# Altium PCB PCB1.PcbDoc (part 1 of 2)
Units mm, origin at the board's own origin, x right, y up, seen from the top; angles counter-clockwise.
Board outline 91 x 53 mm, 2 copper layers (Top Layer, Bottom Layer); 68 components, 95 nets, 342 pads, 353 vias.
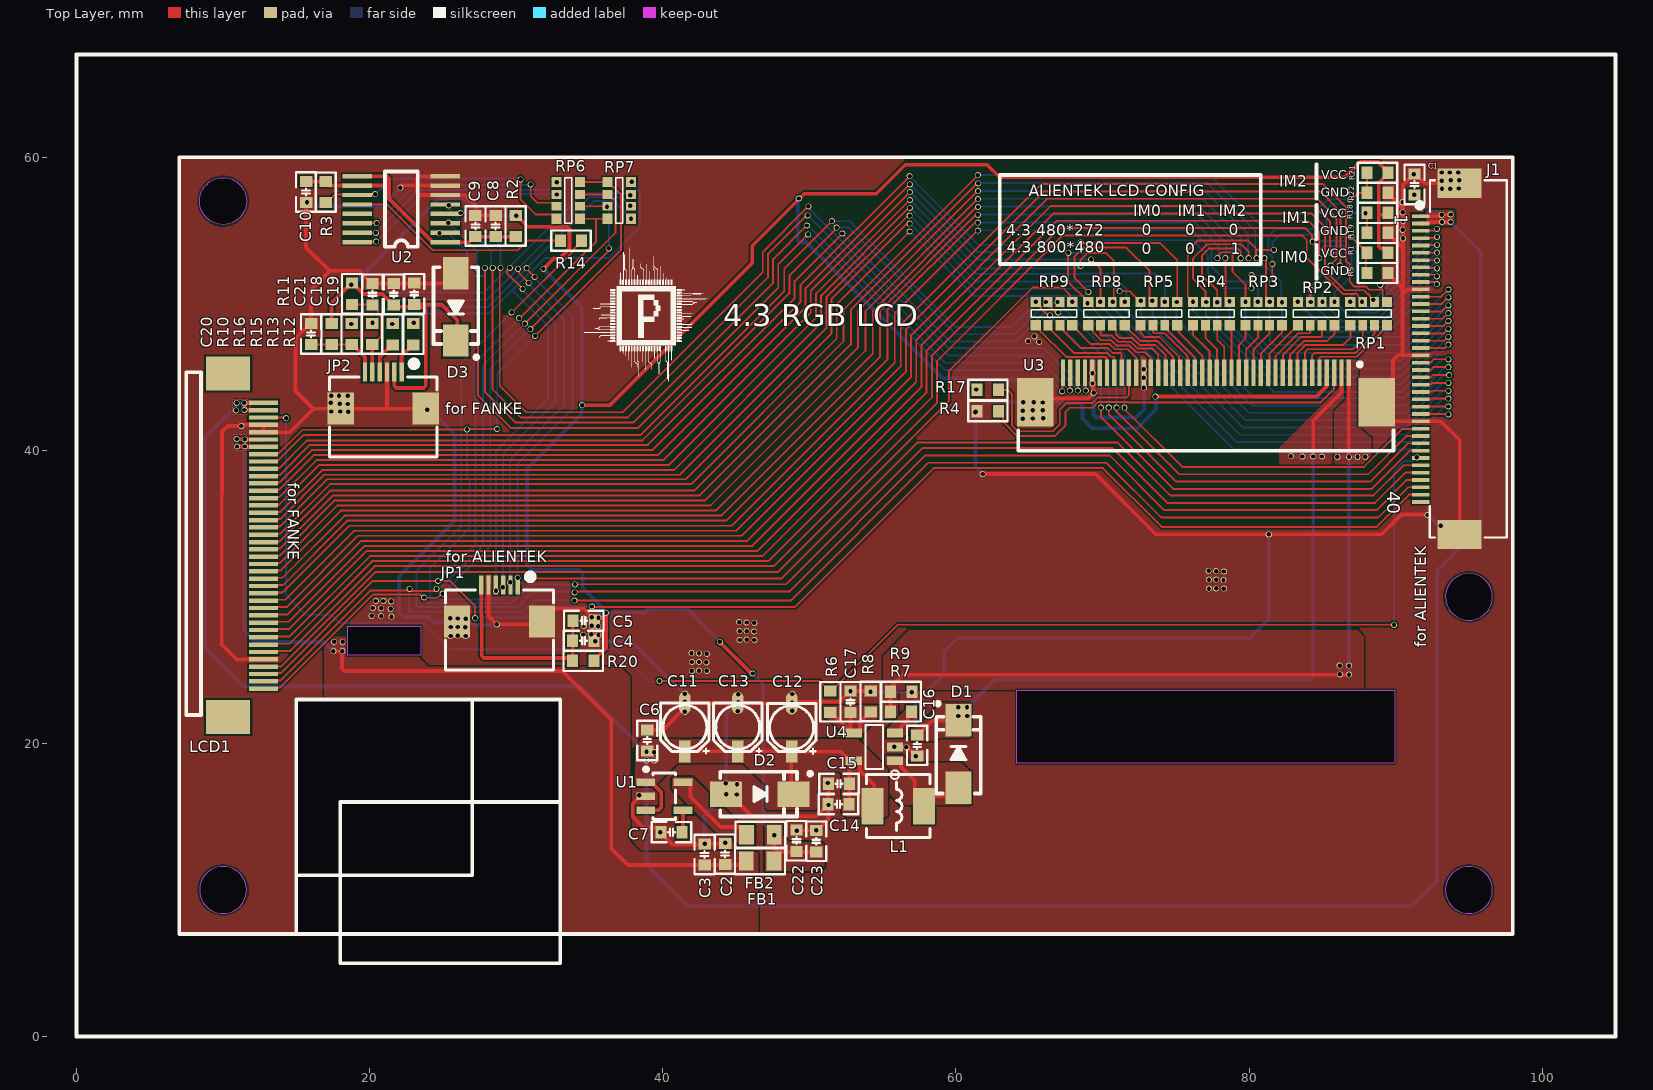
[diagram p0: Top Layer view]
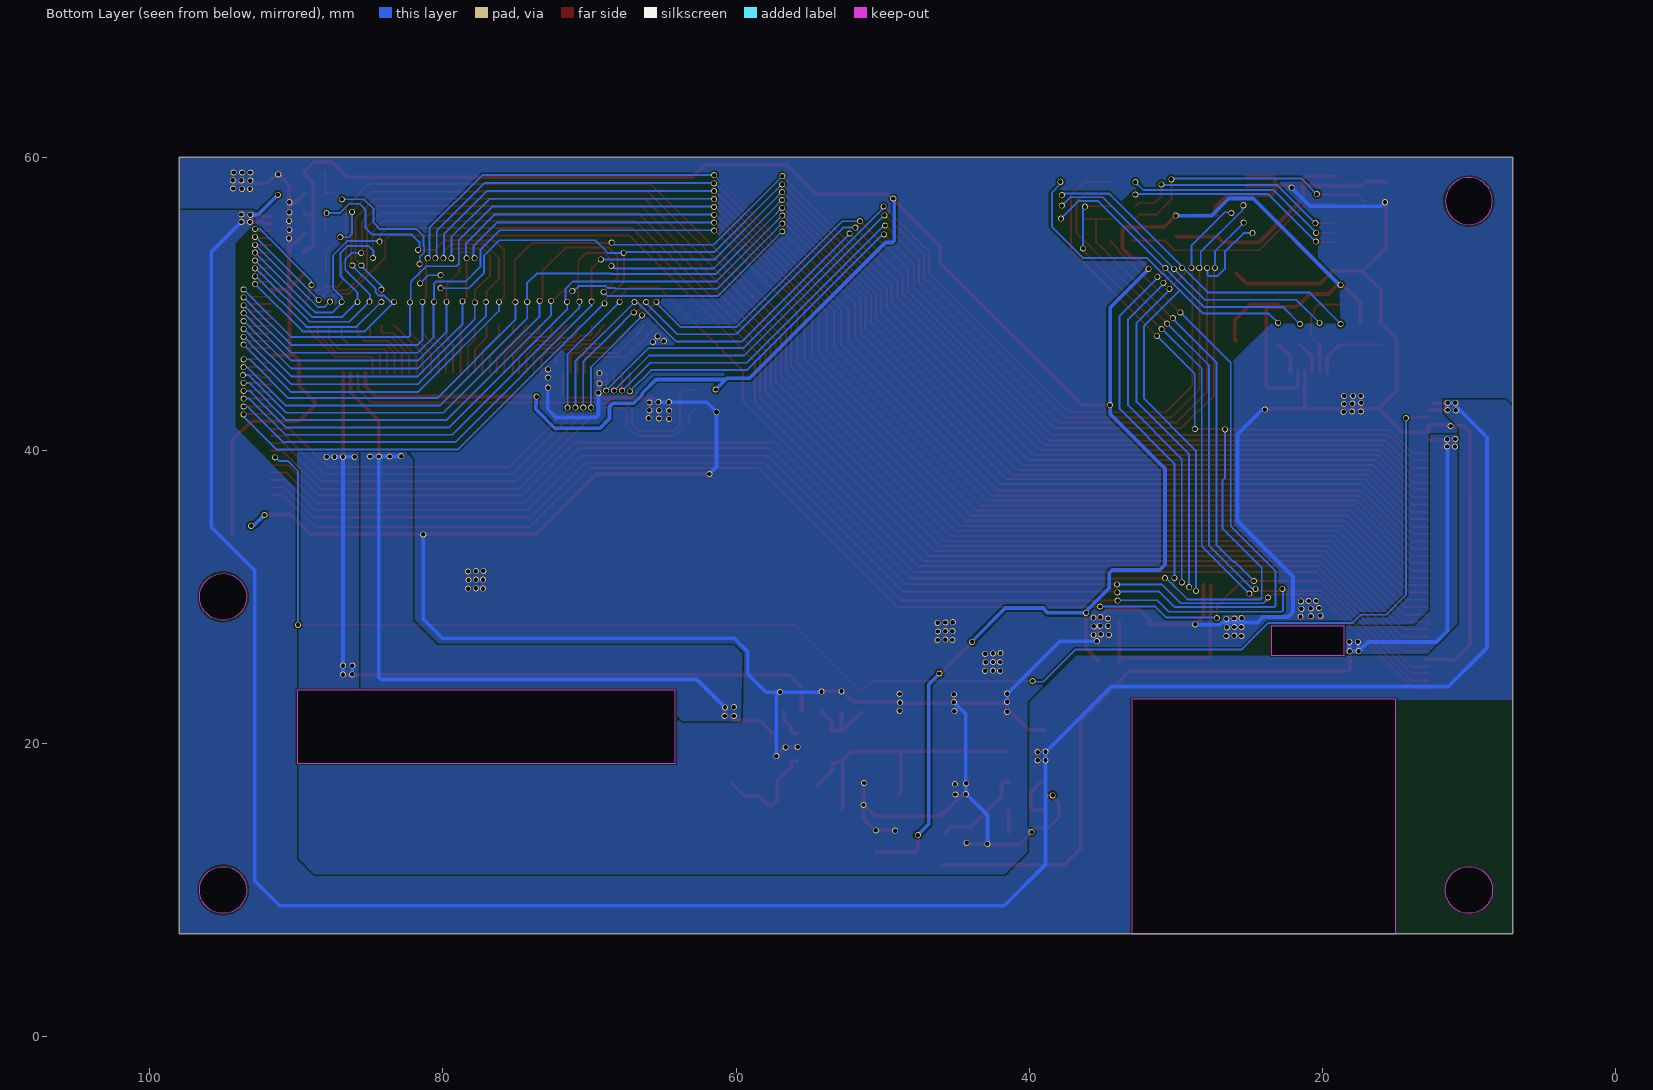
[diagram p1: Bottom Layer view, seen from below]
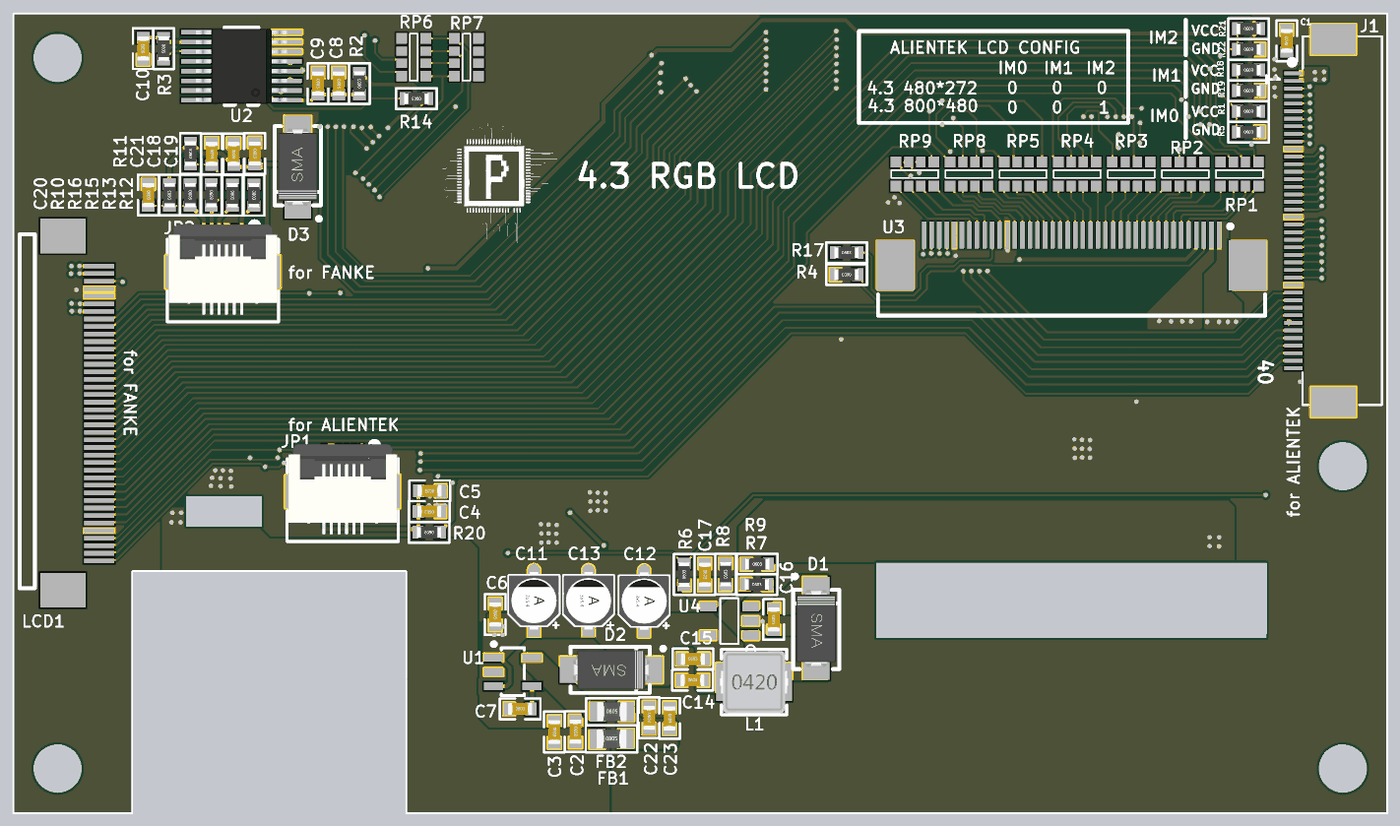
[diagram p3: 3D render of the assembled board from above, using the file's embedded part models]

## Layer stack, top to bottom
Top Solder: solder mask 0.0102, Solder Resist, Dk 3.5
Top Layer: signal copper 0.0356
Dielectric 1: dielectric 0.32, FR-4, Dk 4.8
Bottom Layer: signal copper 0.0356
Bottom Solder: solder mask 0.0102, Solder Resist, Dk 3.5

## Board outline
7,7 7,60 98,60 98,7
cut-out: 93.4,30 ccw(c95,30) 95,28.4 ccw(c95,30) 96.6,30 ccw(c95,30) 95,31.6 ccw(c95,30)
cut-out: 93.4,10 ccw(c95,10) 95,8.4 ccw(c95,10) 96.6,10 ccw(c95,10) 95,11.6 ccw(c95,10)
cut-out: 8.4,10 ccw(c10,10) 10,8.4 ccw(c10,10) 11.6,10 ccw(c10,10) 10,11.6 ccw(c10,10)
cut-out: 10,55.4 cw(c10,57) 8.4,57 cw(c10,57) 10,58.6 cw(c10,57) 11.6,57 cw(c10,57)
cut-out: 18.5,26 18.5,28 23.5,28 23.5,26
cut-out: 15,7 15,23 33,23 33,7
cut-out: 64.135,18.631 64.135,23.631 89.941,23.631 89.941,18.631

## Design rules (kind name [scope] priority, off if disabled: settings)
Clearance [All] p1: gap=0.127 ignorepadtopadclearanceinfootprint=FALSE
PlaneClearance [All] p1: clearance=0.178
PlaneConnect [All] p1: planeconnectstyle=Direct reliefexpansion=0.508 reliefentries=4 reliefconductorwidth=0.254 reliefairgap=0.254
PolygonConnect [All] p1: connectstyle=Direct reliefconductorwidth=0.254 reliefentries=4 polygonreliefangle="90 Angle" airgapwidth=0.254
RoutingVias [All] p1: holewidth=0.3 width=0.41 viastyle="Through Hole" minholewidth=0.3 minwidth=0.41 maxholewidth=0.3 maxwidth=0.41
SolderMaskExpansion [All] p1: expansion=0.102 istentingtop=FALSE
Width power [InNetClass('power')] p1: maxlimit=0.305 minlimit=0.254 preferedwidth=0.254 minimp=50.000000 maximp=50.000000 favimp=50.000000
Width [All] p2: maxlimit=0.305 minlimit=0.127 preferedwidth=0.127 minimp=50.000000 maximp=50.000000 favimp=50.000000
28 further rules are at their usual default settings.

## Classes and differential pairs
net class power: +3.3_board +3.3_EXT +5 GND L3.3V LED+ LED-

## Components (designator, comment, footprint, x,y, rotation, side; value= is the part's Value field where it differs from the comment)
C1 "0.1uf" C0603_L 91.288,58.129 r90 top
C2 "10uf" C0603_L 44.247,12.446 r270 top
C3 "0.1uf" C0603_L 42.85,12.421 r270 top
C4 "0.1uf" C0603_L 34.581,27 r180 top
C5 "10uf" C0603_L 34.606,28.372 r180 top
C6 "1uf" C0603_L 38.938,20.193 r270 top
C7 "22nf" C0603_L 40.589,13.945 r0 top
C8 "10uf" C0603_L 28.591,55.302 r270 top
C9 "0.1uf" C0603_L 27.219,55.302 r270 top
C10 "0.1uf" C0603_L 15.662,57.615 r90 top
C11 "220uf" "CE A(3*5.4)" 41.504,21.107 r270 top
C12 "220uf" "CE A(3*5.4)" 48.793,21.082 r270 top
C13 "68uf" "CE A(3*5.4)" 45.11,21.107 r270 top
C14 "10uf" C0603_L 51.994,15.85 r0 top
C15 "0.1uf" C0603_L 52.019,17.247 r0 top
C16 "1uf" C0603_L 57.353,19.863 r90 top
C17 "6.8nf" C0603_L 52.807,22.835 r270 top
C18 "0.1uf" C0603_L 23.038,50.673 r270 top
C19 "1uf" C0603_L 21.641,50.648 r270 top
C20 "100pf" C0603_L 16.002,47.93 r270 top
C21 "100pf" C0603_L 20.193,50.648 r270 top
C22 "0.1uf" C0603_L 49.124,13.36 r270 top
C23 "10uf" C0603_L 50.47,13.321 r270 top
D1 "SS14/1N5819" SMA 60.173,19.279 r90 top
D2 "SS24" SMA 46.62,16.535 r0 top
D3 "CESD3V3D3" SMA 25.883,49.784 r270 top
FB1 "CBG160808U121T" FB0805 46.634,11.963 r0 top
FB2 "CBG160808U121T" FB0805 46.66,13.767 r0 top
J1 "TFTLCD" FPC-TOP40 91.618,55.975 r270 top locked
JP1 "CON-6P" FPC0.5-WT-6P 28.859,28.321 r180 top locked
JP2 "CON-6P" FPC0.5-WT-6P 20.93,42.85 r180 top locked
L1 "22uH" L-SMD-0420 56.058,15.723 r0 top
LCD1 "FPC插座40P，翻盖下接，0.5mm间距" FPC40P-0.5MM 10.642,33.5 r90 top locked
R1 "10K" R0603_L 88.761,53.462 r0 top
R2 "10R" R0603_L 29.962,55.302 r90 top
R3 "100K" R0603_L 17.008,57.613 r270 top
R4 "0R" R0603_L 62.179,42.672 r180 top
R5 "10K" R0603_L 88.761,52.095 r0 top
R6 "360R" R0603_L 51.435,22.835 r90 top
R7 "1K" R0603_L 56.247,22.174 r0 top
R8 "10K" R0603_L 54.178,22.86 r90 top
R9 "7.5R" R0603_L 56.273,23.52 r0 top
R10 "2.7K" R0603_L 17.399,47.93 r90 top
R11 "2.7K" R0603_L 18.796,50.673 r90 top
R12 "2.7K" R0603_L 22.987,47.918 r270 top
R13 "2.7K" R0603_L 21.565,47.918 r270 top
R14 "47R" R0603_L 33.731,54.305 r180 top
R15 "39R" R0603_L 20.168,47.932 r270 top
R16 "39R" R0603_L 18.771,47.932 r270 top
R17 "10K/0R" R0603_L 62.179,44.12 r0 top
R18 "10K" R0603_L 88.761,56.195 r0 top
R19 "10K" R0603_L 88.761,54.828 r0 top
R20 "10R" R0603_L 34.569,25.629 r180 top
R21 "10K" R0603_L 88.761,58.928 r0 top
R22 "10K" R0603_L 88.761,57.561 r0 top
RP1 "120R排阻" 0603_4P 88.16,49.323 r180 top
RP2 "120R排阻" 0603_4P 84.582,49.323 r180 top
RP3 "120R排阻" 0603_4P 81.004,49.323 r180 top
RP4 "120R排阻" 0603_4P 77.426,49.323 r180 top
RP5 "120R排阻" 0603_4P 73.848,49.323 r180 top
RP6 "47R排阻" 0603_4P 33.553,57.048 r270 top
RP7 "47R排阻" 0603_4P 37.033,57.048 r270 top
RP8 "120R排阻" 0603_4P 70.27,49.323 r180 top
RP9 "120R排阻" 0603_4P 66.692,49.323 r180 top
U1 "RT9193-33" SOT-23-5 38.837,17.343 r0 top
U2 "XPT2046/NC" SSOP16 25.162,54.199 r180 top
U3 "FPC-0.5-40P" CONN-SMD_FPC-0.5-40P 77.055,43.094 r180 top locked
U4 "CAT4139" SOT-23(OT)5_LEAD 54.432,19.761 r90 top

## Footprints (in the part's own frame and the unit in brackets; to place one, negate y for a bottom-side part, rotate by r counter-clockwise, add the part's x,y. Pads: shape width x height; smd on the part's side, far side on the other; paste and mask are expansions set on the pad)
0603_4P [mm]
  rect 0.7x0.7 smd: 1(-1.25,-0.8) 4(1.25,-0.8) 5(1.25,0.8) 8(-1.25,0.8)
  rect 0.6x0.7 smd: 2(-0.4,-0.8) 3(0.4,-0.8) 6(0.4,0.8) 7(-0.4,0.8)
  silkscreen extent -1.55,-0.25 1.55,0.25
C0603_L [mm]
  rect 0.75x0.85 smd: 1(-0.725,0) 2(0.725,0)
  silkscreen extent -1.35,-0.69 1.35,0.69, body extent -0.8,-0.4 0.8,0.4, height 0.8
"CE A(3*5.4)" [mm]
  rect 1.5x0.8 smd: 1(1.651,0)
  oval 1.5x0.8 smd: 2(-1.65,0)
  silkscreen extent -1.65,-1.65 1.8,1.65, body extent -1.9,-1.65 1.9,1.65, height 5.45
CONN-SMD_FPC-0.5-40P [mm]
  rect 0.3x1.8 smd paste+0 mask+0.05: 1(-9.75,-2.188) 2(-9.25,-2.188) 3(-8.75,-2.188) 4(-8.25,-2.188) 5(-7.75,-2.188) 6(-7.25,-2.188) 7(-6.75,-2.188) 8(-6.25,-2.188) 9(-5.75,-2.188) 10(-5.25,-2.188) 11(-4.75,-2.188) 12(-4.25,-2.188) 13(-3.75,-2.188) 14(-3.25,-2.188) 15(-2.75,-2.188) 16(-2.25,-2.188) 17(-1.75,-2.188) 18(-1.25,-2.188) 19(-0.75,-2.188) 20(-0.25,-2.188) 21(0.25,-2.188) 22(0.75,-2.188) 23(1.25,-2.188) 24(1.75,-2.188) 25(2.25,-2.188) 26(2.75,-2.188) 27(3.25,-2.188) 28(3.75,-2.188) 29(4.25,-2.188) 30(4.75,-2.188) 31(5.25,-2.188) 32(5.75,-2.188) 33(6.25,-2.188) 34(6.75,-2.188) 35(7.25,-2.188) 36(7.75,-2.188) 37(8.25,-2.188) 38(8.75,-2.188) 39(9.25,-2.188) 40(9.75,-2.188)
  rect 2.5x3.3 smd paste+0 mask+0.05: 41(-11.65,-0.188) 42(11.65,-0.188)
  silkscreen extent -12.8,-2.9 12.8,3.14
FB0805 [mm]
  rect 1x1.3 smd: 1(-0.95,0) 2(0.95,0)
  silkscreen extent -1.7,-0.89 1.7,0.89, body extent -1,-0.65 1,0.65, height 1.3
FPC0.5-WT-6P [mm]
  rect 1.8x2.2 smd: 0(-2.9,0) 0(2.9,0)
  rect 0.3x1.3 smd: 1(-1.25,-2.497) 2(-0.75,-2.497) 3(-0.25,-2.497) 4(0.25,-2.497) 5(0.75,-2.497) 6(1.25,-2.497)
  silkscreen extent -3.67,-3.23 3.67,3.3, body extent -3.6,-3.15 3.6,2.85, height 2
FPC40P-0.5MM [mm]
  rect 2.3x3 smd: 0(-11.7,0.297) 0(11.73,0.297)
  rect 0.3x2 smd: 1(9.736,-2.108) 2(9.236,-2.108) 3(8.736,-2.108) 4(8.236,-2.108) 5(7.736,-2.108) 6(7.236,-2.108) 7(6.736,-2.108) 8(6.236,-2.108) 9(5.736,-2.108) 10(5.236,-2.108) 11(4.736,-2.108) 12(4.236,-2.108) 13(3.736,-2.108) 14(3.236,-2.108) 15(2.736,-2.108) 16(2.236,-2.108) 17(1.736,-2.108) 18(1.236,-2.108) 19(0.736,-2.108) 20(0.236,-2.108) 21(-0.264,-2.108) 22(-0.764,-2.108) 23(-1.264,-2.108) 24(-1.764,-2.108) 25(-2.264,-2.108) 26(-2.764,-2.108) 27(-3.264,-2.108) 28(-3.764,-2.108) 29(-4.264,-2.108) 30(-4.764,-2.108) 31(-5.264,-2.108) 32(-5.764,-2.108) 33(-6.264,-2.108) 34(-6.764,-2.108) 35(-7.264,-2.108) 36(-7.764,-2.108) 37(-8.264,-2.108) 38(-8.764,-2.108) 39(-9.264,-2.108) 40(-9.764,-2.108)
  silkscreen extent -11.57,2.14 11.83,3.16
FPC-TOP40 [mm]
  rect 0.25x1.2 smd: 1(0,0.102) 2(0.5,0.102) 3(1,0.102) 4(1.5,0.102) 5(2,0.102) 6(2.5,0.102) 7(3,0.102) 8(3.5,0.102) 9(4,0.102) 10(4.5,0.102) 11(5,0.102) 12(5.5,0.102) 13(6,0.102) 14(6.5,0.102) 15(7,0.102) 16(7.5,0.102) 17(8,0.102) 18(8.5,0.102) 19(9,0.102) 20(9.5,0.102) 21(10,0.102) 22(10.5,0.102) 23(11,0.102) 24(11.5,0.102) 25(12,0.102) 26(12.5,0.102) 27(13,0.102) 28(13.5,0.102) 29(14,0.102) 30(14.5,0.102) 31(15,0.102) 32(15.5,0.102) 33(16,0.102) 34(16.5,0.102) 35(17,0.102) 36(17.5,0.102) 37(18,0.102) 38(18.5,0.102) 39(19,0.102) 40(19.5,0.102)
  rect 2x3 smd: A(-2.25,2.754) B(21.725,2.754)
  silkscreen extent -2.45,-0.15 21.92,5.97
L-SMD-0420 [mm]
  rect 1.5x2.5 smd: 1(-1.75,0) 2(1.75,0)
  silkscreen extent -2.16,-2.16 2.16,2.16, body extent -2.25,-2.05 2.25,2.05
R0603_L [mm]
  rect 0.75x0.85 smd: 1(-0.725,0) 2(0.725,0)
  silkscreen extent -1.35,-0.69 1.35,0.69, body extent -0.8,-0.4 0.8,0.4, height 0.4
SMA [mm]
  rect 2.2x1.75 smd: 1(-2.3,0) 2(2.3,0)
  silkscreen extent -2.7,-1.52 3.56,1.52, body extent -2.55,-1.3 2.55,1.3, height 2.15
SOT-23(OT)5_LEAD [mm]
  rect 0.6x1.1 smd: 1(-0.95,-1.4) 2(0,-1.4) 3(0.95,-1.4) 4(0.95,1.4) 5(-0.95,1.4)
  silkscreen extent -2.2,-1.7 1.5,0.6
SOT-23-5 [mil]
  rect 50x20 smd: 1(0,0) 2(0,-37.4) 3(0,-74.8) 4(100,-74.8) 5(100,0)
  silkscreen extent 0,-99 80,35
SSOP16 [mm]
  rect 2x0.3 smd: 1(0,0) 2(0,-0.643) 3(0,-1.286) 4(0,-1.929) 5(0,-2.572) 6(0,-3.215) 7(0,-3.858) 8(0,-4.501) 9(6,-4.501) 10(6,-3.858) 11(6,-3.215) 12(6,-2.572) 13(6,-1.929) 14(6,-1.286) 15(6,-0.643) 16(6,0)
  silkscreen extent 1.89,-4.82 4.11,0.32, body extent 0,-4.75 6.02,0.23, height 1.71

## Part data
C1 C2 C3 C4 C5 C6 C7 C8 C9 C10 C14 C15 C16 C17 C18 C19 C20 C21 C22 C23: library part C, "贴片电容/MLCC电容"
C11 C12 C13: library part CE_SMD, "贴片电解电容"
D1 D2: library part SS14, "肖特基二极管"
D3: library part 1N4007, "整流二极管"
FB1 FB2: library part FB, "贴片磁珠"
J1: library part FPC-40, "FPC-40P-0.5mm"
JP1 JP2: library part "Header 6", "6P连接器"
L1: library part "L-Molding Choke", "一体成型电感"
LCD1: library part MY-RGB
R1 R2 R3 R4 R5 R6 R7 R8 R9 R10 R11 R12 R13 R14 R15 R16 R17 R18 R19 R20 R21 R22: library part R, "贴片电阻"
RP1 RP2 RP3 RP4 RP5 RP6 RP7 RP8 RP9: library part RES_4P
U1: "3.3V超低压差LDO"
U2: library part ADS7843
U4: "LED Driver IC 1 Output DC DC Regulator Step-Up (Boost) Analog, PWM Dimming 750mA (Switch) TSOT-23-5"

## Via types
v1: diameter 0.41, hole 0.3, Top Layer to Bottom Layer, tented both sides, 353 vias

## Nets (pads, with @x,y where several pads share a name; then routed paths per layer and width w, separated by ;. In a path a pad name is that pad's centre, name@x,y a point inside that pad or via, vN(x,y) a via of type N, cw(c..) or ccw(c..) an arc to the next point about the centre after c; other vN are vias at no path point)
+3.3_board: FB2.1 U1.5 | length 6.3
  Top Layer w0.254: U1.5@41.377,17.343 41.758,17.343 41.885,17.216 41.885,16.358 43.952,14.29 45.337,14.29 45.644,13.983 FB2.1@45.644,13.894
+3.3_EXT: C2.2 C3.2 FB1.1 LCD1.6 LCD1.7 | length 64.3
  Top Layer w0.254: v1(10.922,40.767) 10.947,40.742 v1(11.481,40.742) ; v1(10.947,40.259) v1(11.481,40.259) 11.511,40.229 11.866,40.229 LCD1.7@11.887,40.208 ; 11.706,40.713 12.728,40.713 LCD1.6@12.751,40.736 ; v1(17.526,26.289) v1@18.11,26.289 ; v1@18.11,26.272 18.11,25.092 18.259,24.943 33.147,24.943 36.474,21.615 36.474,12.852 37.631,11.696 C2.2@44.171,11.696 ; C2.2@44.247,11.696 45.859,11.696 FB1.1@45.923,11.76
  Bottom Layer w0.254: v1(11.481,40.259) 11.455,40.234 11.455,27.686 12.217,26.924 16.891,26.924 v1(17.526,26.289) ; v1(11.481,40.742) 11.511,40.712 11.511,40.382 v1@11.532,40.361 ; v1(17.577,26.924) 17.551,26.899 17.551,26.314 v1(17.526,26.289) ; v1(18.161,26.924) 18.148,26.911 18.148,26.302 v1(18.136,26.289) v1(17.526,26.289)
+5: C1.1 C6.2 C11.1 C12.1 C13.1 C14.2 C15.2 D2.2 J1.1 J1.2 L1.1 LCD1.1 LCD1.2 U1.1 U1.3 U4.5 | length 194.2
  Top Layer w0.254: LCD1.1@12.344,43.231 v1(11.455,43.231) v1(11.455,42.748) 11.461,42.742 12.745,42.742 LCD1.2@12.751,42.736 ; U1.3@38.837,15.443 38.84,15.447 39.704,15.447 39.903,15.646 39.903,16.657 39.263,17.297 U1.1@39.192,17.297 ; C11.1@41.504,19.456 C13.1@45.11,19.456 C12.1@48.717,19.456 ; C12.1@48.768,19.329 48.768,16.688 D2.2@48.92,16.535 ; C12.1@48.793,19.431 52.162,19.431 U4.5@52.837,18.756 ; C14.2@52.781,15.57 52.719,15.633 C14.2@52.719,15.85 52.719,18.638 U4.5@52.837,18.756 ; U4.5@53.032,18.72 U4.5@53.162,18.72 ; U4.5@53.032,18.811 52.892,18.811 U4.5@52.837,18.756 ; U4.5@53.162,18.669 53.424,18.669 53.455,18.638 53.455,18.135 54.422,17.168 54.422,17.018 ; v1(91.262,57.429) C1.1@91.288,57.404 ; J1.2@91.719,55.475 92.19,55.475 92.265,55.55 92.329,55.55 92.354,55.575 v1(93.167,55.575) v1(93.751,55.575) ; J1.1@91.719,55.975 93.017,55.975 93.1,56.058 v1(93.142,56.058) 93.154,56.07 93.739,56.07 v1(93.751,56.083)
  Bottom Layer w0.254: 10.871,43.002 8.763,40.894 8.763,26.518 11.405,23.876 34.4,23.876 38.845,19.431 v1(38.887,19.431) ; v1(10.922,43.231) v1@11.405,43.231 ; v1@38.862,19.406 38.887,19.38 38.887,11.735 41.707,8.915 91.135,8.915 92.837,10.617 92.837,31.801 95.809,34.773 95.809,53.518 v1@93.777,55.55 ; v1(91.262,57.429) 92.604,56.088 93.112,56.088 v1(93.142,56.058)
  other v1: 38.887,18.847 39.421,18.847 39.421,19.406 10.897,42.723
CT_INT: JP1.1 R13.1 RP7.5 | length 44.8
  Top Layer w0.127: v1(21.539,48.616) 21.539,48.618 R13.1@21.565,48.643 ; v1(30.099,31.293) 30.109,31.283 JP1.1@30.109,30.818 ; v1(30.709,52.426) 30.759,52.375 30.759,52.325 v1(31.255,51.829)
  Bottom Layer w0.127: v1(21.539,48.616) 22.708,49.784 28.092,49.784 35.321,57.012 36.619,57.012 v1(37.833,55.798) ; v1(30.099,31.293) 30.099,39.091 33.83,42.822 33.83,49.182 31.232,51.78 31.232,51.806 v1(31.255,51.829)
CT_RST: JP1.4 R12.1 RP7.8 | length 45
  Top Layer w0.127: R12.1@22.987,48.643 22.987,48.666 v1(23.012,48.692) ; JP1.4@28.609,30.818 28.623,30.804 v1(28.623,30.402)
  Bottom Layer w0.127: v1(23.012,48.692) 23.647,49.327 28.118,49.327 29.718,50.927 ; v1(28.623,30.402) 28.623,39.982 32.156,43.515 32.156,48.489 29.718,50.927 ; v1(37.871,58.318) 37.871,58.166 38.456,57.582 38.456,55.245 36.324,53.113 31.956,53.113 30.862,52.02 30.811,52.02 29.718,50.927
CT_SCL: JP1.3 R16.1 RP7.7 | length 47.7
  Top Layer w0.127: v1(18.745,48.616) 18.771,48.641 R16.1@18.771,48.657 ; v1(29.091,30.666) 29.109,30.684 JP1.3@29.109,30.818 ; v1(29.566,52.451) 29.54,52.451 29.362,52.273 29.362,52.086 v1(30.437,51.011)
  Bottom Layer w0.127: v1(18.745,48.616) 20.904,50.775 27.828,50.775 34.573,57.52 37.577,57.52 37.693,57.404 v1(37.77,57.404) ; v1(29.091,30.666) 29.091,39.718 32.674,43.301 32.674,48.703 30.414,50.963 30.437,50.986 v1(30.437,51.011)
CT_SDA: JP1.2 R15.1 RP7.6 | length 45.8
  Top Layer w0.127: R15.1@20.168,48.657 20.168,48.666 v1(20.193,48.692) ; v1(29.591,30.988) 29.591,30.963 29.609,30.945 JP1.2@29.609,30.818 ; v1(30.124,52.375) 30.178,52.321 30.178,52.093 v1(30.849,51.423)
  Bottom Layer w0.127: v1(20.193,48.692) 21.768,50.267 28.016,50.267 v1(30.124,52.375) 30.124,52.401 34.99,57.266 37.196,57.266 v1(37.77,56.693) ; v1(29.591,30.988) 29.591,39.395 33.255,43.06 33.255,48.944 30.825,51.374 30.825,51.399 v1(30.849,51.423)
DISP: R17.2 U3.31 | length 14.4
  Top Layer w0.127: R17.2@62.904,44.12 63.525,44.12 63.83,43.815 63.83,41.687 64.217,41.3 66.593,41.3 67.081,41.789 67.081,42.774 67.526,43.218 69.289,43.218 69.67,43.599 71.654,43.599 71.805,43.75 U3.31@71.805,45.282
GND: C1.2 C2.1 C3.1 C4.1 C5.1 C6.1 C7.1 C8.1 C9.1 C10.1 C11.2 C12.2 C13.2 C14.1 C15.1 C16.1 C17.1 C18.1 C19.1 C20.1 C21.1 C22.1 C23.1 D2.1 D3.1 J1.11 J1.20 J1.29 J1.A J1.B JP1.0 JP1.5 JP2.0 JP2.3 LCD1.4 LCD1.5 LCD1.36 R4.2 R5.2 R8.2 R9.2 R19.2 R22.2 U1.2 U2.6 U2.7 U2.8 U3.29 U3.36 U3.41 U3.42 U4.2 | length 311.3
  Top Layer w0.254: LCD1.5@12.751,41.236 LCD1.5@12.764,41.236 ; LCD1.36@12.954,25.73 12.948,25.736 LCD1.36@12.751,25.736 11.364,25.736 11.332,25.705 10.947,25.705 9.906,26.746 9.906,37.084 9.931,37.109 9.931,41.275 10.312,41.656 v1(11.252,41.656) 11.294,41.656 11.37,41.731 12.746,41.731 LCD1.4@12.751,41.736 12.751,41.25 LCD1.5@12.764,41.236 ; C10.1@15.662,56.89 15.662,53.832 17.272,52.222 ; 16.104,42.875 14.935,44.044 14.935,47.638 15.952,48.655 C20.1@16.002,48.655 16.002,50.952 17.272,52.222 ; JP2.0@18.009,42.824 16.154,42.824 14.566,41.236 LCD1.5@12.764,41.236 ; JP2.0@18.03,42.85 18.055,42.824 21.285,42.824 ; JP2.3@21.18,45.347 21.18,42.93 21.285,42.824 ; v1(22.098,57.912) 22.273,58.087 23.231,58.087 ; JP2.0@23.825,42.824 21.285,42.824 ; U2.7@25.162,58.057 23.261,58.057 23.231,58.087 ; U2.8@25.162,58.7 23.38,58.7 23.231,58.551 23.231,58.087 ; D3.1@25.883,52.084 25.171,51.373 C19.1@21.641,51.373 C21.1@20.193,51.373 20.143,51.373 19.536,51.98 19.536,52.016 19.304,52.248 17.297,52.248 17.272,52.222 ; JP1.5@28.109,30.818 28.109,28.686 v1(28.675,28.12) 31.803,28.12 JP1.0@31.877,28.194 ; C8.1@28.591,56.027 C9.1@27.219,56.027 27.285,56.092 27.285,56.634 26.527,57.391 25.185,57.391 U2.6@25.162,57.414 23.44,57.414 23.231,57.623 23.231,58.087 ; JP1.0@31.759,28.321 31.759,28.412 32.532,29.185 34.609,29.185 35.083,28.71 35.083,28.67 35.141,28.612 v1(35.15,28.612) ; C5.1@35.331,28.372 35.319,28.359 35.319,27 35.357,27 v1(35.382,26.975) ; U1.2@38.339,16.393 38.329,16.383 38.329,16.266 37.948,15.885 37.948,14.986 38.691,14.243 39.616,14.243 C7.1@39.827,14.032 ; v1(38.405,16.459) 38.771,16.459 U1.2@38.837,16.393 ; C6.1@38.938,20.918 40.014,20.918 41.504,22.407 v1(41.504,22.835) ; C7.1@39.864,13.945 39.864,13.895 40.652,13.106 C3.1@42.901,13.106 ; C11.2@41.581,22.835 41.658,22.757 45.098,22.757 C13.2@45.11,22.745 ; C3.1@42.698,13.158 44.234,13.158 C2.1@44.247,13.171 ; D2.1@44.32,16.535 v1(44.323,16.535) 44.545,16.535 46.044,15.037 50.506,15.037 51.268,15.799 C14.1@51.294,15.799 ; C13.2@45.136,22.745 C12.2@48.793,22.745 ; C12.2@48.946,22.838 52.035,22.838 52.757,23.56 C17.1@52.807,23.56 ; C22.1@49.124,14.085 49.143,14.066 50.45,14.066 C23.1@50.47,14.046 50.52,14.046 51.308,14.834 v1(51.308,15.799) C14.1@51.294,15.799 ; C15.1@51.294,17.247 C14.1@51.294,15.799 ; C17.1@52.807,23.572 R8.2@54.165,23.572 ; U4.2@55.832,19.761 56.68,19.761 57.379,19.062 C16.1@57.379,19.025 ; v1(61.331,42.606) 61.341,42.615 v1(61.341,42.621) 61.392,42.672 R4.2@61.454,42.672 ; v1(61.824,38.379) 69.52,38.379 73.635,34.265 v1(81.343,34.265) 89.052,34.265 90.399,35.611 92.151,35.611 v1(92.177,35.585) ; U3.42@65.405,43.282 65.659,43.536 69.012,43.536 v1(69.393,43.917) 69.393,43.942 69.389,43.946 69.389,44.2 69.328,44.261 69.328,45.259 U3.36@69.305,45.282 ; U3.41@88.705,43.282 89.828,44.405 89.828,46.14 90.163,46.475 J1.20@91.719,46.475 ; U3.41@88.773,43.205 88.773,43.03 89.828,41.975 J1.29@91.719,41.975 ; R5.2@89.486,52.095 89.486,52.045 90.475,51.057 90.475,46.507 90.5,46.482 ; R19.2@89.486,54.828 89.486,54.778 90.5,53.765 ; R22.2@89.486,57.561 89.486,57.511 90.5,56.498 ; J1.29@91.618,41.986 93.066,41.986 94.372,40.68 J1.B@94.372,34.25 ; J1.11@91.719,50.975 90.802,50.975 90.5,50.673 90.5,53.765 ; J1.A@94.372,58.225 91.967,58.225 91.338,58.854 C1.2@91.288,58.854 91.238,58.854 90.5,58.117 90.5,56.498 ; 90.5,53.765 90.5,56.498
  Bottom Layer w0.254: v1(15.723,56.921) 16.002,56.642 20.828,56.642 v1(22.098,57.912) ; v1(23.92,42.764) 24.114,42.764 25.781,41.097 25.781,35.179 21.996,31.394 21.996,28.956 22.327,28.626 24.033,28.626 24.414,28.245 26.845,28.245 27.001,28.089 28.602,28.089 28.633,28.12 v1(28.675,28.12) ; v1(35.382,26.975) 37.897,26.975 41.504,23.368 v1(41.504,22.835) ; v1(42.852,13.146) 42.852,15.116 v1@44.323,16.586 ; v1(44.323,16.535) v1@44.323,16.586 ; v1(45.136,22.809) 44.323,21.996 v1@44.323,16.586 ; v1(54.172,23.536) 54.213,23.495 v1@56.972,23.495 ; v1(57.252,19.126) 57.252,23.216 v1@56.972,23.495 ; v1(61.331,42.606) 61.331,38.872 v1(61.824,38.379) ; v1(61.341,42.621) 62.001,43.282 v1(65.303,43.282) ; v1(69.393,43.917) 69.393,42.418 69.571,42.24 72.288,42.24 72.847,42.799 72.847,44.247 v1(72.822,44.272) ; v1(81.343,34.265) 81.343,28.486 80.035,27.178 60.122,27.178 59.207,26.264 59.207,24.74 57.963,23.495 v1(56.998,23.495) v1@56.972,23.495 ; v1(92.177,35.585) 92.883,34.879 93.061,34.879 v1(93.091,34.849)
  other v1: 44.272,13.208 39.827,13.945 49.149,14.046 50.47,14.072 45.034,16.51 45.06,17.221 44.298,17.272 51.257,17.297 56.617,19.736 55.804,19.761 41.504,22.149 45.11,22.2 48.844,22.225 48.819,22.784 45.136,23.343 48.844,23.368 41.504,23.393 52.807,23.546 41.986,24.943 43.002,24.943 42.469,24.968 42.977,25.527 41.986,25.552 42.469,25.552 43.002,26.111 42.469,26.137 41.961,26.162 45.237,27.051 46.253,27.051 45.72,27.076 25.527,27.33 26.543,27.33 26.01,27.356 34.569,27.407 35.611,27.407 35.106,27.433 46.228,27.635 45.237,27.661 45.72,27.661 26.518,27.915 25.527,27.94 26.01,27.94 35.585,27.991 34.62,28.016 35.157,28.016 46.253,28.219 45.72,28.245 45.212,28.27 26.543,28.499 26.01,28.524 34.62,28.524 25.502,28.55 35.611,28.575 21.488,28.651 20.777,28.677 20.142,28.702 21.438,29.185 20.777,29.21 20.218,29.235 21.463,29.693 20.422,29.718 20.93,29.718 77.267,30.556 78.283,30.556 77.749,30.582 78.257,31.14 77.267,31.166 77.749,31.166 78.283,31.725 77.749,31.75 77.241,31.775 64.567,42.139 65.253,42.164 65.964,42.189 18.542,42.621 17.374,42.647 17.983,42.647 64.567,42.697 65.253,42.723 65.913,42.723 18.517,43.155 17.958,43.18 17.348,43.231 65.913,43.256 64.592,43.282 17.374,43.713 17.907,43.713 18.517,43.713 69.317,44.552 72.822,44.958 69.317,45.263 72.822,45.517 65.684,47.396 64.922,47.447 65.354,47.777 90.5,54.458 90.475,55.042 90.5,55.651 90.475,56.236 90.475,56.921 93.167,57.836 93.726,57.836 94.31,57.861 93.142,58.395 93.751,58.42 94.336,58.42 91.237,58.826 93.142,58.953 93.701,58.953 94.285,58.953
L3.3V: C18.2 C19.2 C22.2 C23.2 D3.2 FB1.2 FB2.2 JP2.2 R1.2 R2.2 R10.2 R11.2 R17.1 R18.2 R20.1 R21.2 U3.4 | length 224.3
  Top Layer w0.254: R10.2@17.399,48.655 17.399,50.051 R11.2@18.688,51.34 ; R11.2@18.853,51.391 19.584,50.66 20.853,50.66 21.591,49.923 C19.2@21.641,49.923 21.779,49.784 23.038,49.784 23.066,49.756 23.676,49.756 23.825,49.607 23.825,44.396 23.676,44.247 21.828,44.247 21.68,44.396 JP2.2@21.68,45.347 ; C18.2@23.038,49.948 24.906,49.948 25.984,48.87 25.984,47.586 D3.2@25.883,47.484 ; R2.2@29.962,56.027 29.978,56.027 v1(29.997,56.007) ; R2.2@30.074,55.931 30.108,55.931 30.794,55.245 32.248,55.245 32.298,55.194 33.209,55.194 33.259,55.245 33.486,55.245 33.635,55.096 33.635,53.775 32.95,53.09 32.567,53.09 v1(31.852,52.375) ; v1(34.493,43.078) 36.398,43.078 46.101,52.781 46.101,53.95 49.657,57.506 54.559,57.506 56.54,59.487 62.128,59.487 62.992,58.623 86.538,58.623 87.579,59.665 88.8,59.665 89.486,58.978 R21.2@89.486,58.928 89.486,58.878 88.857,58.249 88.857,56.07 ; R20.1@35.294,25.629 35.294,25.679 36.119,26.503 v1(36.119,28.905) ; v1(43.891,26.924) 46.05,24.765 v1(46.126,24.765) ; v1(47.6,13.741) 47.6,13.757 47.584,13.741 47.584,12.852 47.841,12.596 C23.2@50.47,12.596 ; v1(73.609,43.663) 84.595,43.663 85.282,44.349 85.282,45.259 U3.4@85.305,45.282 ; R1.2@89.486,53.462 89.486,53.512 89.238,53.76 88.988,53.76 88.857,53.891 88.857,56.07 ; R18.2@89.486,56.195 89.361,56.07 88.857,56.07
  Bottom Layer w0.254: v1(18.745,51.283) 18.821,51.283 24.714,57.175 26.391,57.175 27.559,56.007 v1(29.997,56.007) ; v1(31.852,52.375) 31.852,52.349 34.468,49.733 34.468,42.469 30.734,38.735 30.734,32.182 31.09,31.826 34.341,31.826 34.544,31.623 34.544,30.596 36.089,29.051 36.089,28.935 v1(36.119,28.905) 38.731,28.905 39.061,29.235 41.631,29.235 43.891,26.975 v1(43.891,26.924) ; v1@46.114,24.752 46.863,24.003 46.863,14.478 v1(47.6,13.741) ; v1(49.276,57.175) 49.2,57.099 49.2,54.327 49.349,54.178 49.809,54.178 59.08,44.907 60.63,44.907 60.706,44.831 ; v1(61.392,44.145) 60.706,44.831 ; v1(73.609,43.663) 73.639,43.633 73.639,43.083 73.66,43.062 73.66,42.799 72.365,41.504 69.291,41.504 68.631,42.164 68.631,42.977 68.402,43.205 66.98,43.205 66.396,43.79 66.396,43.891 65.456,44.831 60.706,44.831
LCD_B0: J1.21 LCD1.12 RP5.1 | length 102.1
  Top Layer w0.127: LCD1.12@12.751,37.736 12.817,37.802 13.85,37.802 16.071,40.023 39.315,40.023 49.392,50.1 49.392,51.243 v1(56.845,58.697) ; v1(68.493,54.171) 68.513,54.15 73.917,54.15 75.098,52.969 RP5.1@75.098,50.123 ; J1.21@91.719,45.975 92.383,45.975 92.614,46.207 v1(93.599,46.207)
  Bottom Layer w0.127: v1(56.845,58.697) 56.868,58.697 57.241,58.324 57.241,58.301 61.521,54.021 68.374,54.021 68.493,54.139 v1(68.493,54.171) ; v1(75.057,50.114) 75.057,48.902 80.398,43.561 90.551,43.561 93.197,46.207 v1(93.599,46.207)
LCD_B1: J1.22 LCD1.16 RP5.2 | length 100.6
  Top Layer w0.127: LCD1.16@12.751,35.736 12.814,35.8 13.905,35.8 16.749,38.644 40.765,38.644 50.806,48.686 50.806,50.547 56.797,56.538 v1(56.856,56.538) ; J1.22@91.719,45.475 92.383,45.475 92.577,45.669 v1(93.599,45.669)
  Bottom Layer w0.127: v1(56.856,56.538) 56.879,56.538 57.241,56.176 57.241,56.153 61.373,52.021 68.47,52.021 68.501,52.051 73.603,52.051 74.27,51.384 74.27,50.145 v1(74.248,50.123) 74.248,49.004 80.191,43.061 90.755,43.061 93.329,45.634 93.564,45.634 v1(93.599,45.669)
LCD_B2: J1.23 LCD1.19 RP5.3 | length 106.3
  Top Layer w0.127: LCD1.19@12.751,34.236 12.814,34.3 13.903,34.3 17.294,37.69 41.932,37.69 51.867,47.625 51.867,49.959 56.834,54.927 v1(56.845,54.927) ; v1(69.041,50.805) 68.097,51.748 68.097,53.24 68.68,53.823 71.628,53.823 73.211,52.239 73.211,50.359 RP5.3@73.392,50.179 ; J1.23@91.719,44.975 92.383,44.975 92.54,45.132 93.645,45.132 v1(93.648,45.13)
  Bottom Layer w0.127: v1(56.845,54.927) 56.856,54.927 61.262,50.521 68.757,50.521 v1(69.041,50.805) ; v1(73.404,50.192) 73.404,50.214 73.406,50.216 73.406,49.138 79.983,42.561 90.694,42.561 93.263,45.13 v1(93.648,45.13)
LCD_B3: J1.24 LCD1.18 RP5.4 | length 100
  Top Layer w0.127: LCD1.18@12.751,34.736 12.814,34.8 13.895,34.8 17.12,38.024 41.558,38.024 51.513,47.979 51.513,50.328 56.606,55.421 56.802,55.421 v1(56.845,55.464) ; v1(71.171,50.851) 71.87,50.851 RP5.4@72.574,50.146 ; J1.24@91.719,44.475 92.383,44.475 92.503,44.595 v1(93.599,44.595)
  Bottom Layer w0.127: v1(56.845,55.464) 56.879,55.464 57.241,55.102 57.241,55.079 61.299,51.021 68.214,51.021 68.252,51.059 68.735,51.059 68.877,51.2 70.745,51.2 71.095,50.851 v1(71.171,50.851) ; v1(72.619,50.19) 72.619,49.219 79.776,42.061 90.677,42.061 93.211,44.595 v1(93.599,44.595)
LCD_B4: J1.25 LCD1.17 RP8.1 | length 100.6
  Top Layer w0.127: LCD1.17@12.751,35.236 12.814,35.3 13.887,35.3 16.916,38.329 41.156,38.329 51.16,48.332 51.16,50.437 56.637,55.915 56.682,55.915 56.768,56.001 v1(56.845,56.001) ; J1.25@91.719,43.975 92.383,43.975 92.466,44.058 v1(93.599,44.058)
  Bottom Layer w0.127: v1(56.845,56.001) 56.879,56.001 57.241,55.639 57.241,55.616 61.336,51.521 68.529,51.521 68.535,51.515 71.141,51.515 71.628,51.029 71.628,50.197 71.554,50.123 v1(71.52,50.123) 71.52,49.611 79.569,41.561 90.71,41.561 92.761,43.612 92.761,43.634 93.185,44.058 v1(93.599,44.058)
LCD_B5: J1.26 LCD1.15 RP8.2 | length 103.1
  Top Layer w0.127: LCD1.15@12.751,36.236 12.818,36.303 13.849,36.303 16.535,38.989 40.402,38.989 50.453,49.039 50.453,50.693 56.834,57.075 v1(56.856,57.075) ; v1(68.504,52.588) 68.504,52.985 68.986,53.467 70.231,53.467 70.764,52.934 RP8.2@70.764,50.217 ; J1.26@91.719,43.475 92.383,43.475 92.429,43.521 v1(93.599,43.521) ; v1@93.594,43.475 v1@93.65,43.419
  Bottom Layer w0.127: v1(56.856,57.075) 56.879,57.075 57.241,56.713 57.241,56.69 61.529,52.402 68.095,52.402 68.097,52.404 68.288,52.404 68.472,52.588 v1(68.504,52.588) ; v1(70.688,50.14) 70.688,49.735 79.362,41.061 90.743,41.061 93.204,43.521 v1(93.599,43.521)
LCD_B6: J1.27 LCD1.14 RP8.3 | length 101.9
  Top Layer w0.127: LCD1.14@12.751,36.736 12.822,36.807 13.845,36.807 16.372,39.334 40.04,39.334 50.099,49.393 50.099,50.877 56.834,57.612 v1(56.856,57.612) ; v1(69.23,53.021) 69.875,52.375 RP8.3@69.875,50.14 ; J1.27@91.719,42.975 92.383,42.975 92.392,42.984 v1(93.599,42.984) ; v1@93.582,42.967 93.65,42.899 v1@93.65,42.882
  Bottom Layer w0.127: v1(56.856,57.612) 56.879,57.612 57.241,57.25 57.241,57.227 61.447,53.021 68.231,53.021 v1(69.23,53.021) ; v1(69.85,50.14) 69.866,50.124 69.866,49.85 79.155,40.561 90.904,40.561 93.31,42.968 93.582,42.968 v1(93.599,42.984)
LCD_B7: J1.28 LCD1.13 R21.1 R22.1 RP8.4 | length 132.8
  Top Layer w0.127: LCD1.13@12.751,37.236 12.826,37.311 13.841,37.311 16.209,39.678 39.678,39.678 49.745,49.746 49.745,51.06 56.834,58.149 v1(56.856,58.149) ; v1(67.666,53.467) 67.64,53.442 67.64,51.502 68.979,50.163 v1(68.979,50.03) ; v1(80.162,51.054) v1(80.162,51.943) ; v1(81.559,51.384) 81.585,51.41 v1(81.585,52.705) ; v1(86.893,57.125) 86.904,57.114 87.01,57.114 87.457,57.561 R22.1@87.991,57.561 ; R22.1@88.036,57.561 R22.1@87.991,57.561 ; R21.1@88.036,58.928 88.036,57.607 R22.1@87.991,57.561 ; J1.28@91.719,42.475 93.571,42.475 v1(93.599,42.447) ; v1(93.599,42.447) 93.65,42.399 v1@93.65,42.345
  Bottom Layer w0.127: v1(56.856,58.149) 56.879,58.149 57.241,57.787 57.241,57.764 61.484,53.521 67.612,53.521 v1(67.666,53.467) ; v1@67.716,53.492 67.742,53.467 68.783,53.467 68.91,53.594 68.91,53.645 69.596,54.331 76.149,54.331 77.191,53.289 77.191,52.095 78.232,51.054 v1(80.162,51.054) ; v1(68.979,50.03) 78.948,40.061 91.365,40.061 v1@93.65,42.345 ; v1(80.162,51.943) 81.001,51.943 v1(81.559,51.384) ; v1(81.585,52.705) 81.585,53.188 81.28,53.492 81.28,53.873 81.331,53.924 81.331,54.635 81.788,55.093 84.303,55.093 84.734,55.524 84.734,56.464 85.395,57.125 v1(86.893,57.125)
LCD_BL: J1.34 LCD1.3 R6.2 | length 106.3
  Top Layer w0.127: LCD1.3@12.751,42.236 14.127,42.236 14.173,42.189 v1(14.3,42.189) ; v1(39.776,24.257) 50.688,24.257 51.348,23.597 R6.2@51.435,23.597 ; R6.2@51.435,23.56 51.485,23.56 56.018,28.092 v1(89.891,28.092)
  Bottom Layer w0.127: v1(14.3,42.189) 14.3,30.124 15.646,28.778 17.374,28.778 17.932,28.219 23.698,28.219 25.502,26.416 36.83,26.416 39.04,24.206 39.726,24.206 v1(39.776,24.257) ; v1(89.891,28.092) 89.891,38.557 90.602,39.268 91.186,39.268 91.44,39.522 91.442,39.52 v1(91.442,39.518)
LCD_CLK: J1.30 LCD1.37 RP9.1 | length 99.4
  Top Layer w0.127: LCD1.37@12.751,25.236 13.933,25.236 20.385,31.688 47.843,31.688 59.538,43.383 59.538,45.415 65.227,51.105 67.285,51.105 67.8,50.589 67.8,50.264 v1(67.942,50.123) ; v1(71.501,42.901) 71.501,42.799 75.438,38.862 87.843,38.862 90.422,41.441 91.686,41.441 J1.30@91.719,41.475
  Bottom Layer w0.127: v1(67.942,50.123) 71.501,46.563 v1(71.501,42.901)
LCD_DE: J1.33 LCD1.9 RP9.4 | length 98.8
  Top Layer w0.127: LCD1.9@12.751,39.236 12.837,39.323 13.77,39.323 15.479,41.032 38.462,41.032 48.289,50.859 48.289,52.379 v1(51.537,55.626) ; v1(65.442,50.123) 65.801,49.763 65.801,49.694 66.236,49.259 66.367,49.259 v1(66.421,49.205) ; v1(69.89,42.901) 69.89,42.289 74.817,37.362 88.361,37.362 90.974,39.975 J1.33@91.719,39.975
  Bottom Layer w0.127: v1(51.537,55.626) 52.756,55.626 59.969,48.412 63.805,48.412 65.442,50.049 v1(65.442,50.123) ; v1(66.421,49.205) 66.421,49.149 69.89,45.68 v1(69.89,42.901)
LCD_G0: J1.12 LCD1.24 RP3.1 | length 103.1
  Top Layer w0.127: LCD1.24@12.751,31.736 12.814,31.8 13.943,31.8 18.03,35.887 43.617,35.887 54.329,46.599 54.329,49.498 61.431,56.6 v1(61.505,56.6) ; J1.12@91.719,50.475 93.086,50.475 93.577,50.966 v1(93.599,50.966)
  Bottom Layer w0.127: v1(61.505,56.6) 61.529,56.625 76.637,56.625 78.919,54.342 78.919,52.729 79.096,52.553 81.153,52.553 82.194,51.511 82.194,50.14 v1(82.245,50.089) 82.245,47.801 82.32,47.726 90.36,47.726 93.203,50.57 93.203,50.592 93.577,50.966 v1(93.599,50.966)
LCD_G1: J1.13 LCD1.20 RP3.2 | length 104.6
  Top Layer w0.127: LCD1.20@12.751,33.736 12.795,33.781 13.867,33.781 17.352,37.265 42.168,37.265 52.329,47.427 52.329,49.581 v1@61.392,58.643 ; v1(81.049,53.111) 81.049,53.035 81.167,52.916 81.167,51.552 81.164,51.548 81.164,51.22 81.167,51.217 81.167,50.359 v1(81.404,50.123) ; J1.13@91.719,49.975 93.123,49.975 93.577,50.429 v1(93.599,50.429)
  Bottom Layer w0.127: v1(61.493,58.773) 77.317,58.773 80.919,55.171 v1@80.919,53.213 ; v1(81.404,50.123) 81.404,47.497 81.712,47.189 90.36,47.189 93.203,50.033 93.203,50.055 93.577,50.429 v1(93.599,50.429)
LCD_G2: J1.14 LCD1.27 RP3.3 | length 102.8
  Top Layer w0.127: LCD1.27@12.751,30.236 12.814,30.3 14.069,30.3 18.622,34.852 44.704,34.852 55.829,45.977 55.829,49.35 61.469,54.989 v1(61.493,54.989) ; J1.14@91.719,49.475 93.16,49.475 93.577,49.892 v1(93.599,49.892)
  Bottom Layer w0.127: v1(61.493,54.989) 61.518,55.014 76.126,55.014 77.445,53.696 77.445,52.527 78.461,51.511 80.489,51.511 80.604,51.396 v1(80.604,50.123) 80.638,50.089 80.638,47.726 81.712,46.652 90.36,46.652 93.203,49.496 93.203,49.518 93.577,49.892 v1(93.599,49.892)
LCD_G3: J1.15 LCD1.26 RP3.4 | length 104
  Top Layer w0.127: LCD1.26@12.751,30.736 12.814,30.8 14.086,30.8 18.484,35.197 44.342,35.197 55.329,46.184 55.329,49.572 61.254,55.497 61.464,55.497 v1(61.493,55.526) ; v1(77.84,53.111) 77.84,53.188 77.984,53.332 77.984,53.356 78.054,53.427 78.054,53.443 78.118,53.507 78.793,53.507 78.867,53.432 78.867,52.197 79.754,51.31 v1(79.754,50.123) ; J1.15@91.719,48.975 93.197,48.975 93.577,49.355 v1(93.599,49.355)
  Bottom Layer w0.127: v1(61.493,55.526) 61.518,55.551 76.296,55.551 77.919,53.928 77.919,53.267 77.84,53.188 v1(77.84,53.111) ; v1(79.754,50.123) 79.754,48.073 81.712,46.115 90.36,46.115 93.203,48.959 93.203,48.981 93.577,49.355 v1(93.599,49.355)
LCD_G4: J1.16 LCD1.25 RP4.1 | length 103.8
  Top Layer w0.127: LCD1.25@12.751,31.236 12.814,31.3 14.053,31.3 18.295,35.542 43.98,35.542 54.829,46.391 54.829,49.535 61.285,55.991 61.344,55.991 61.416,56.063 v1(61.493,56.063) ; v1(78.377,53.111) 78.389,53.099 78.389,50.409 RP4.1@78.649,50.15 ; J1.16@91.719,48.475 93.234,48.475 93.577,48.818 v1(93.599,48.818)
  Bottom Layer w0.127: v1(61.493,56.063) 61.518,56.088 76.467,56.088 78.419,54.135 78.419,53.327 78.407,53.315 78.407,53.141 v1(78.377,53.111) ; v1(78.664,50.165) 78.664,48.626 81.712,45.578 90.36,45.578 93.203,48.422 93.203,48.444 93.577,48.818 v1(93.599,48.818)